# Altium PCB key ledt.PcbDoc
Units mm, origin at the board's own origin, x right, y up, seen from the top; angles counter-clockwise.
Board outline 412.33 x 259.38 mm, 2 copper layers (Top Layer, Bottom Layer); 10 components, 0 nets, 67 pads, 0 vias.
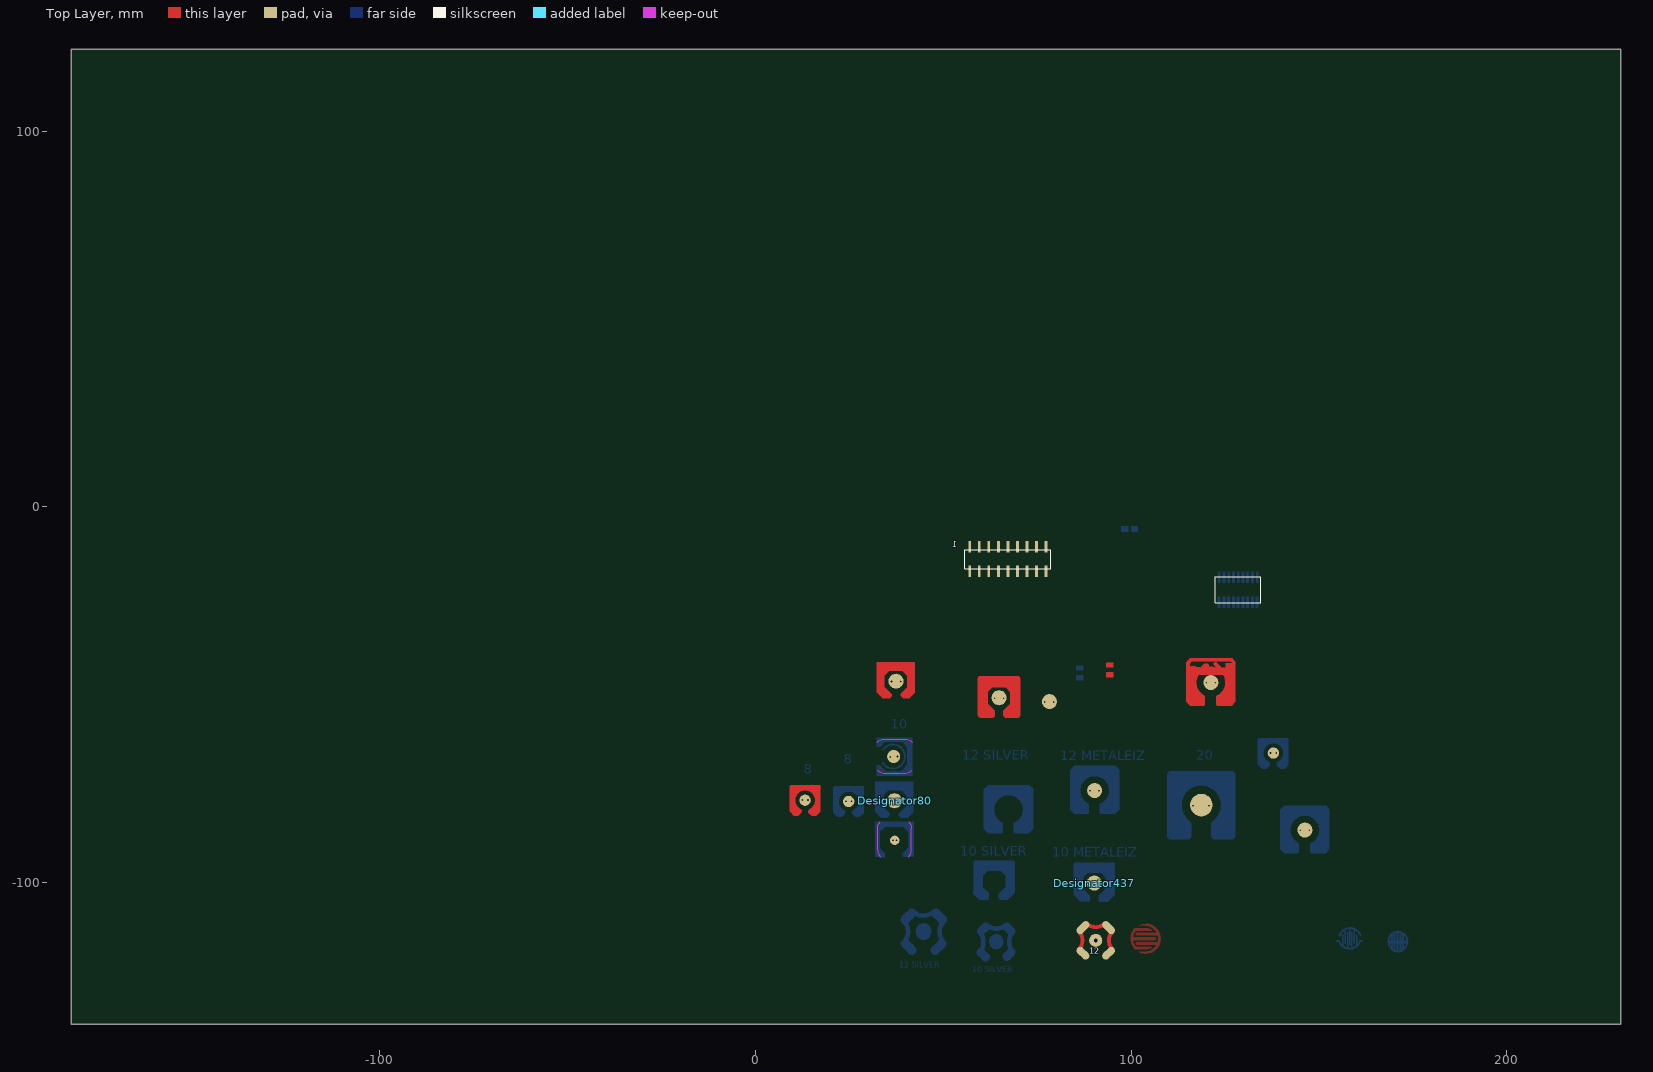
[diagram p0: Top Layer view]
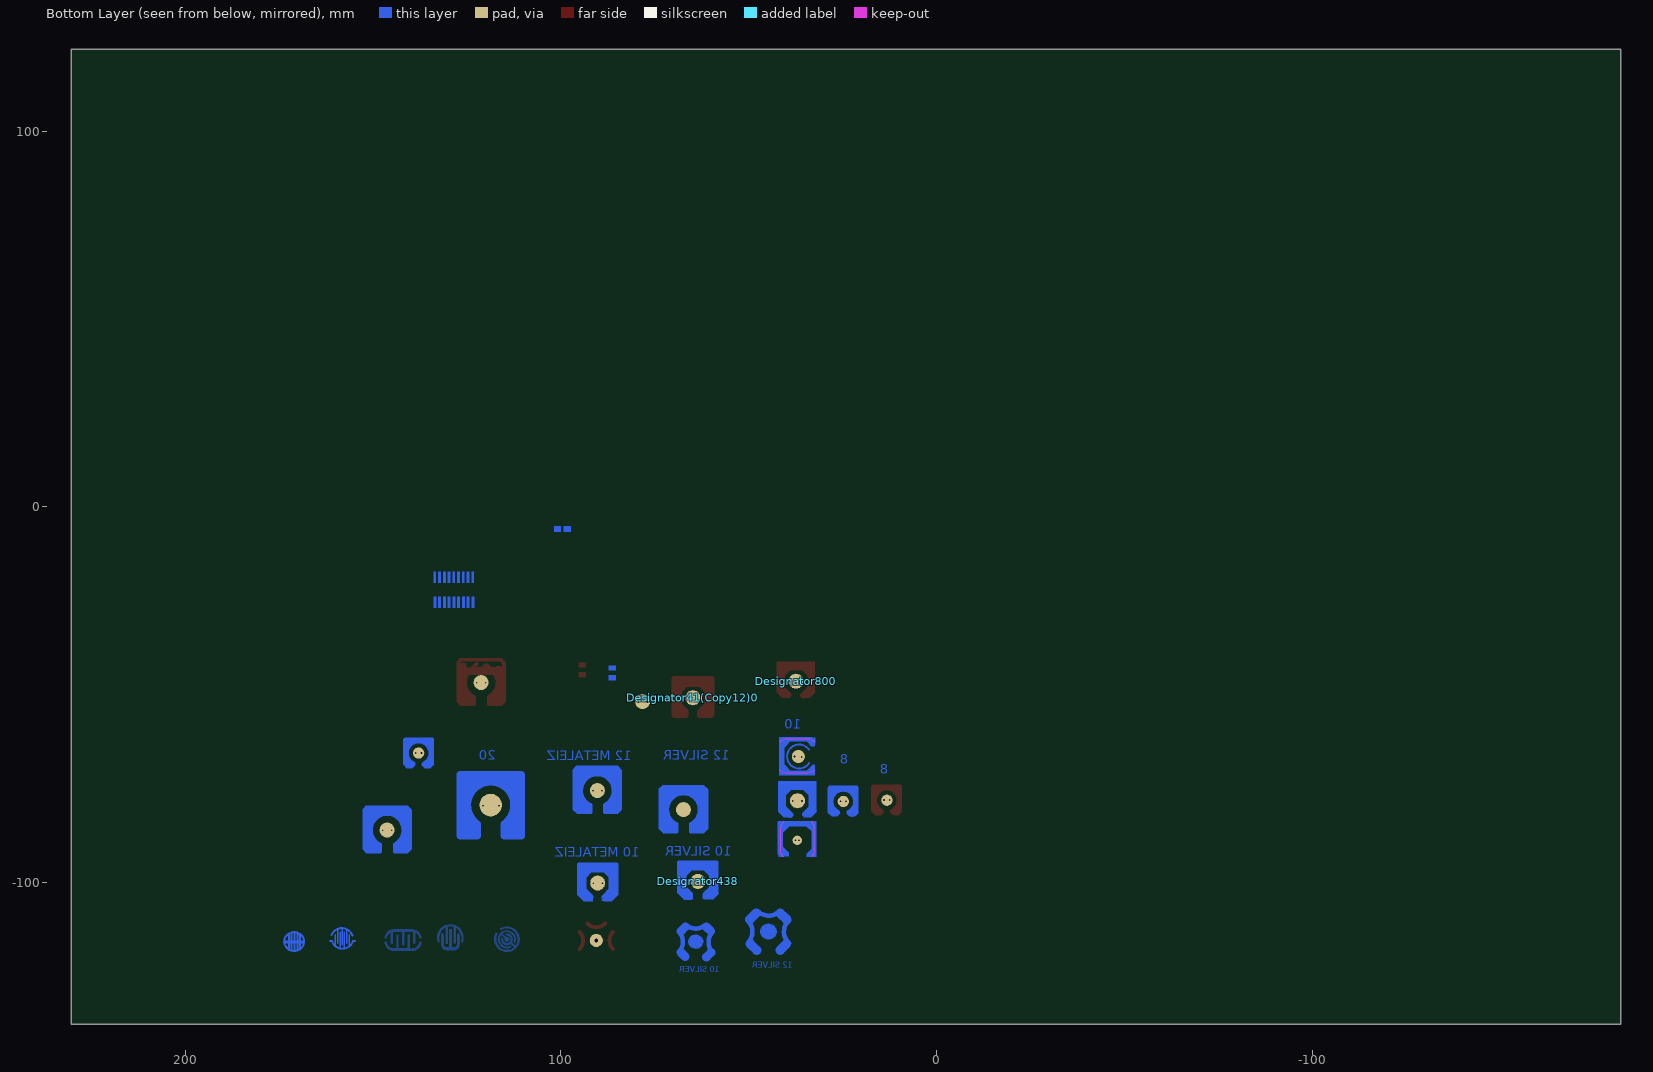
[diagram p1: Bottom Layer view, seen from below]

## Layer stack, top to bottom
Top Solder: solder mask 0.0102, Solder Resist, Dk 3.5
Top Layer: signal copper 0.0356
Dielectric 1: dielectric 0.32, FR-4, Dk 4.8
Bottom Layer: signal copper 0.0356
Bottom Solder: solder mask 0.0102, Solder Resist, Dk 3.5

## Board outline
-182.033,-137.582 230.296,-137.582 230.296,121.802 -182.033,121.802

## Design rules (kind name [scope] priority, off if disabled: settings)
Clearance [All] p1: gap=0.254 ignorepadtopadclearanceinfootprint=FALSE except(0: Arc-Hole Track-Hole SMDPad-Hole THPad-Hole Via-Hole Fill-Hole Poly-Hole Region-Hole Text-Hole)
PolygonConnect [All] p1: connectstyle=Relief reliefconductorwidth=0.254 reliefentries=4 polygonreliefangle="90 Angle" airgapwidth=0.254
RoutingVias [All] p1: holewidth=0.711 width=1.27 viastyle="Through Hole" minholewidth=0.711 minwidth=1.27 maxholewidth=0.711 maxwidth=1.27
SolderMaskExpansion [All] p1: expansion=0.102
Width [All] p1: maxlimit=2 minlimit=0.254 preferedwidth=0.254
30 further rules are at their usual default settings.

## Components (designator, comment, footprint, x,y, rotation, side; value= is the part's Value field where it differs from the comment)
1 "Comment" HDR2X9 57.048,-15.138 r0 top
12 "Comment" MEM/2 90.576,-115.341 r0 top
Designator41(Copy12)0 "Comment" 12B 64.872,-50.775 r0 bottom
Designator80 "Comment" 10 37.036,-78.176 r180 top
Designator437 "Comment" 12#1 90.195,-100.076 r180 top
Designator438 "Comment" 12#2 63.543,-99.621 r180 top
Designator800 "Comment" 10 37.436,-46.376 r0 bottom
? "Comment" PCBComponent_1#1 13.251,-78.003 r180 bottom
? "Comment" PCBComponent_1#1 137.846,-65.456 r0 top
? "Comment" PCBComponent_1#2 146.196,-86.003 r0 top

## Footprints (in the part's own frame and the unit in brackets; to place one, negate y for a bottom-side part, rotate by r counter-clockwise, add the part's x,y. Pads: shape width x height; smd on the part's side, far side on the other; paste and mask are expansions set on the pad)
10 [mm]
  round 4 all layers, no hole: 0(0,0)
  Bottom Layer region: -3.7,-1.8 -3,-1.8 -3,1.7 -3.7,1.7
  Bottom Layer region: -4.5,2.6 -4.1,2.6 -4.1,3 -4.5,3
  Bottom Layer region: -4.699,2.4 -3.999,2.4 -3.999,2.8 -4.699,2.8
  Bottom Layer region: -4.999,0.9 -3.999,0.9 -3.999,2.6 -4.999,2.6
  Bottom Layer region: 4.2,2.5 4.5,2.5 4.5,3 4.2,3
  Bottom Layer region: 4,2.4 4.8,2.4 4.8,2.8 4,2.8
  Bottom Layer region: 4.5,1.6 5,1.6 5,1.7 4.5,1.7
  Bottom Layer region: 4.5,1.7 5,1.7 5,2.5 4.5,2.5
  Bottom Layer region: 3.6,-3.8 5,-3.8 5,-1 3.6,-1
  Bottom Layer region: -5,-3.6 -3.4,-3.6 -3.4,-0.8 -5,-0.8
  Bottom Layer region: -4.999,-5 5.001,-5 5.001,-3.4 -4.999,-3.4
  Bottom Layer region: -2.299,-3.5 2.101,-3.5 2.101,-2.9 -2.299,-2.9
  Bottom Layer region: 2.901,-1.6 3.501,-1.6 3.501,1.7 2.901,1.7
  Bottom Layer lines w0.254: 4.8,2.8 3.4,4.2 2.7,4.2 ; 4.8,1.3 4.8,1.6 4.5,1.9 4.5,2.5 4,3 ; 4.44,2.91 4.44,2.96 4.01,3.39 ; 4.1,3.2 3.4,3.9 3.3,3.9 ; 3.7,-2.9 -2.6,-2.9 ; 3.2,4.2 3.231,4.2 3.531,3.9 3,3.9 5,2.5 ; 3.2,3.9 2.9,4.2 ; 3.1,-1.5 1.7,-2.9 ; 2.3,2.6 2.3,2.4 3,1.7 1.6,3.1 ; 1.95,4.35 3.55,4.35 5,2.9 5,2.5 ; 1.5,-3 1.5,-3.2 ; 1.2,-2.9 1.1,-2.9 ; -1.5,3.2 -3.4,1.3 ; -1.8,-2.9 -3.1,-1.6 ; -1.91,4.43 -3.48,4.43 -5,2.9 -5,2.5 ; -2,2.8 -3,1.8 ; -2.5,4.2 -3.4,4.2 -5,2.6 ; -2.5,-2.5 -2.6,-2.5 -3.5,-3.4 ; -2.7,4 -3.5,4 ; -3.4,3.9 -3.4,3.8 -3.9,3.3 ; -4,2.6 -4.1,2.7 -4.1,3 ; -4.5,3 -3.6,3.9 -3,3.9 -5,2.5 ; 5,2.5 5,-5 -5,-5 -5,2.5
  Bottom Layer lines w1.7: 2.1,3.637 cw(c0,0) -1.972,3.708
12#1 [mm]
  round 4 all layers, no hole: 0(0,0)
  Bottom Layer region: -3.7,-1.8 -3,-1.8 -3,1.7 -3.7,1.7
  Bottom Layer region: -4.5,2.6 -4.1,2.6 -4.1,3 -4.5,3
  Bottom Layer region: -4.7,2.4 -4,2.4 -4,2.8 -4.7,2.8
  Bottom Layer region: -5,0.9 -4,0.9 -4,2.6 -5,2.6
  Bottom Layer region: 4.2,2.5 4.5,2.5 4.5,3 4.2,3
  Bottom Layer region: 4,2.4 4.8,2.4 4.8,2.8 4,2.8
  Bottom Layer region: 4.5,1.6 5,1.6 5,1.7 4.5,1.7
  Bottom Layer region: 4.5,1.7 5,1.7 5,2.5 4.5,2.5
  Bottom Layer region: 3.6,-3.8 5,-3.8 5,-1 3.6,-1
  Bottom Layer region: -5,-3.6 -3.4,-3.6 -3.4,-0.8 -5,-0.8
  Bottom Layer region: -5,-5 5,-5 5,-3.4 -5,-3.4
  Bottom Layer region: -2.3,-3.5 2.1,-3.5 2.1,-2.9 -2.3,-2.9
  Bottom Layer region: 2.9,-1.6 3.5,-1.6 3.5,1.7 2.9,1.7
  Bottom Layer lines w0.254: 5,2.9 5,2.5 3,3.9 3.531,3.9 3.231,4.2 3.2,4.2 ; 4.8,2.8 3.4,4.2 2.7,4.2 ; 4.8,1.3 4.8,1.6 4.5,1.9 4.5,2.5 4,3 ; 4.44,2.91 4.44,2.96 4.01,3.39 ; 4.1,3.2 3.4,3.9 3.3,3.9 ; 3.7,-2.9 -2.6,-2.9 ; 3.2,3.9 2.9,4.2 ; 3.1,-1.5 1.7,-2.9 ; 2.3,2.6 2.3,2.4 3,1.7 1.6,3.1 ; 1.5,-3 1.5,-3.2 ; 1.2,-2.9 1.1,-2.9 ; -1.5,3.2 -3.4,1.3 ; -1.8,-2.9 -3.1,-1.6 ; -2,2.8 -3,1.8 ; -2.5,4.2 -3.4,4.2 -5,2.6 ; -2.5,-2.5 -2.6,-2.5 -3.5,-3.4 ; -2.7,4 -3.5,4 ; -3.4,3.9 -3.4,3.8 -3.9,3.3 ; -4,2.6 -4.1,2.7 -4.1,3 ; -4.5,3 -3.6,3.9 -3,3.9 -5,2.5 -5,2.9
  Bottom Layer lines w0.3: 4.1,4.3 3.689,4.722 ; 3.672,4.734 1.264,4.736 ; 3.235,4.2 3.704,4.72 1.24,4.71 1.24,3.57 1.5,3.31 1.54,3.31 ; 3.21,1.49 1.24,3.46 1.24,3.76 ; 1.5,4.1 1.4,4.6 ; -1.3,3.6 -1.3,4.8 -1.717,4.812 ; -1.734,4.823 -3.617,4.812 ; -1.757,4.812 -1.717,4.812 ; -3.2,4.7 -4.2,4.1 ; -3.53,1.16 -1.27,3.42 -1.27,4.77 -1.717,4.812
  Bottom Layer lines w1: 5,2.9 3.55,4.35 1.95,4.35 ; 5,2.5 5,-5 -5,-5 -5,2.5 ; -1.91,4.43 -3.48,4.43 -5,2.9
  Bottom Layer lines w1.7: 2.1,3.637 cw(c0,0) -1.972,3.708
12#2 [mm]
  round 4 smd far side: 0(0,0)
  Bottom Layer region: -3.7,-1.8 -3,-1.8 -3,1.7 -3.7,1.7
  Bottom Layer region: -4.5,2.6 -4.1,2.6 -4.1,3 -4.5,3
  Bottom Layer region: -4.7,2.4 -4,2.4 -4,2.8 -4.7,2.8
  Bottom Layer region: -5,0.9 -4,0.9 -4,2.6 -5,2.6
  Bottom Layer region: 4.2,2.5 4.5,2.5 4.5,3 4.2,3
  Bottom Layer region: 4,2.4 4.8,2.4 4.8,2.8 4,2.8
  Bottom Layer region: 4.5,1.6 5,1.6 5,1.7 4.5,1.7
  Bottom Layer region: 4.5,1.7 5,1.7 5,2.5 4.5,2.5
  Bottom Layer region: 3.6,-3.8 5,-3.8 5,-1 3.6,-1
  Bottom Layer region: -5,-3.6 -3.4,-3.6 -3.4,-0.8 -5,-0.8
  Bottom Layer region: -5,-5 5,-5 5,-3.4 -5,-3.4
  Bottom Layer region: -2.3,-3.5 2.1,-3.5 2.1,-2.9 -2.3,-2.9
  Bottom Layer region: 2.9,-1.6 3.5,-1.6 3.5,1.7 2.9,1.7
  Bottom Layer lines w0.254: 5,2.9 5,2.5 3,3.9 3.531,3.9 3.231,4.2 3.2,4.2 ; 4.8,2.8 3.4,4.2 2.7,4.2 ; 4.8,1.3 4.8,1.6 4.5,1.9 4.5,2.5 4,3 ; 4.44,2.91 4.44,2.96 4.01,3.39 ; 4.1,3.2 3.4,3.9 3.3,3.9 ; 3.7,-2.9 -2.6,-2.9 ; 3.2,3.9 2.9,4.2 ; 3.1,-1.5 1.7,-2.9 ; 2.3,2.6 2.3,2.4 3,1.7 1.6,3.1 ; 1.5,-3 1.5,-3.2 ; 1.2,-2.9 1.1,-2.9 ; -1.5,3.2 -3.4,1.3 ; -1.8,-2.9 -3.1,-1.6 ; -2,2.8 -3,1.8 ; -2.5,4.2 -3.4,4.2 -5,2.6 ; -2.5,-2.5 -2.6,-2.5 -3.5,-3.4 ; -2.7,4 -3.5,4 ; -3.4,3.9 -3.4,3.8 -3.9,3.3 ; -4,2.6 -4.1,2.7 -4.1,3 ; -4.5,3 -3.6,3.9 -3,3.9 -5,2.5 -5,2.9
  Bottom Layer lines w0.3: 4.1,4.3 3.689,4.722 ; 3.235,4.2 3.704,4.72 1.707,4.72 ; 1.54,3.31 1.5,3.31 ; -1.595,3.095 -3.53,1.16 ; -1.717,4.812 -1.757,4.812 ; -1.734,4.823 -3.617,4.812 ; -3.2,4.7 -4.2,4.1
  Bottom Layer lines w1: 5,2.9 3.55,4.35 1.95,4.35 ; 5,2.5 5,-5 -5,-5 -5,2.5 ; -1.91,4.43 -3.48,4.43 -5,2.9
  Bottom Layer lines w1.7: 2.167,3.598 cw(c0,0) -2.238,3.554
12B [mm]
  round 4 all layers, no hole: 0(0,0)
  Bottom Layer region: 2.9,1.7 3.5,1.7 3.5,-1.6 2.9,-1.6
  Bottom Layer region: -2.3,-2.9 2.1,-2.9 2.1,-3.5 -2.3,-3.5
  Bottom Layer region: -5,-3.4 5,-3.4 5,-5 -5,-5
  Bottom Layer region: -5,-0.8 -3.4,-0.8 -3.4,-3.6 -5,-3.6
  Bottom Layer region: 3.6,-1 5,-1 5,-3.8 3.6,-3.8
  Bottom Layer region: 4.5,2.5 5,2.5 5,1.7 4.5,1.7
  Bottom Layer region: 4.5,1.7 5,1.7 5,1.6 4.5,1.6
  Bottom Layer region: 4,2.8 4.8,2.8 4.8,2.4 4,2.4
  Bottom Layer region: 4.2,3 4.5,3 4.5,2.5 4.2,2.5
  Bottom Layer region: -5,2.6 -4,2.6 -4,0.9 -5,0.9
  Bottom Layer region: -4.7,2.8 -4,2.8 -4,2.4 -4.7,2.4
  Bottom Layer region: -4.5,3 -4.1,3 -4.1,2.6 -4.5,2.6
  Bottom Layer region: -3.7,1.7 -3,1.7 -3,-1.8 -3.7,-1.8
  Bottom Layer lines w0.254: -5,2.9 -5,2.5 -3,3.9 -3.6,3.9 -4.5,3 ; -5,2.6 -3.4,4.2 -2.5,4.2 ; -4.1,3 -4.1,2.7 -4,2.6 ; -3.9,3.3 -3.4,3.8 -3.4,3.9 ; -3.5,4 -2.7,4 ; -3.5,-3.4 -2.6,-2.5 -2.5,-2.5 ; -3.4,1.3 -1.5,3.2 ; -3.1,-1.6 -1.8,-2.9 ; -3,1.8 -2,2.8 ; -2.6,-2.9 3.7,-2.9 ; 1.1,-2.9 1.2,-2.9 ; 1.5,-3 1.5,-3.2 ; 1.6,3.1 3,1.7 2.3,2.4 2.3,2.6 ; 1.7,-2.9 3.1,-1.5 ; 2.7,4.2 3.4,4.2 3.4,2.8 ; 2.9,4.2 3.2,3.9 ; 3.2,4.2 3.231,4.2 3.531,3.9 3,3.9 5,2.5 5,2.9 ; 3.3,3.9 3.4,3.9 4.1,3.2 ; 4,3 4.5,2.5 4.5,1.9 4.8,1.6 4.8,1.3 ; 4.01,3.39 4.44,2.96 4.44,2.91
  Bottom Layer lines w0.3: -4.3,4.4 -3.6,5.1 -1.6,5.1 ; -3.53,1.16 -1.27,3.42 -1.27,4.77 -1.6,5.1 ; -1.84,5.1 -1.6,5.1 ; -1.3,3.6 -1.3,4.8 -1.6,5.1 ; 1.24,3.76 1.24,3.46 3.21,1.49 ; 1.4,4.6 1.8,5 3.7,5 4.4,4.3 ; 1.54,3.31 1.5,3.31 1.24,3.57 1.24,4.71 1.53,5 2.07,5
  Bottom Layer lines w1.5: -5,2.9 -3.48,4.43 -1.91,4.43 ; -5,2.5 -5,-5 5,-5 5,2.5 ; -5,2.25 -5,4.45 -4.81,4.64 -1.85,4.64 ; 1.85,4.61 4.84,4.64 5,4.48 ; 1.95,4.35 3.55,4.35 5,2.9 ; 4.99,4.49 5,4.48 ; 5,1.87 5,4.48
  Bottom Layer lines w1.7: -1.972,3.708 ccw(c0,0) 2.1,3.637
HDR2X9 [mil] "Connector; Header; 9x2 Position"
  rect 30x120 smd: 1(0,-80) 2(0,180) 3(100,-80) 4(100,180) 5(200,-80) 6(200,180) 7(300,-80) 8(300,180) 9(400,-80) 10(400,180) 11(500,-80) 12(500,180) 13(600,-80) 14(600,180) 15(700,-80) 16(700,180) 17(800,-80) 18(800,180)
  silkscreen extent -50,-50 850,150
MEM/2 [mm]
  round 3.5 hole 1: 61(0,0)
  oval 2x4 smd rot 135: 62(-3.412,3.412) 63(3.412,-3.412)
  oval 2x4 smd rot 45: 64(-3.412,-3.412) 65(3.412,3.412)
  Top Layer lines w1: -4.49,-2.335 ccw(c-6.825,0) -4.49,2.335 ; -2.335,4.49 ccw(c0,6.825) 2.335,4.49 ; 4.49,-2.335 cw(c6.825,0) 4.49,2.335
PCBComponent_1#1 [mm]
  round 3 all layers, no hole: 1(-0.004,-0.033)
  round 1.5 hole 0.5: 11(-0.75,0.033) 11(0.75,0.033)
  Bottom Layer lines w0.3: 0.996,-2.833 0.996,-3.233 1.796,-4.033 2.996,-4.033 ; -1.004,-2.833 -1.004,-3.333 -1.704,-4.033 -1.804,-4.033 ; -1.104,-3.033 -1.104,-3.233 -1.904,-4.033 -3.004,-4.033 ; 3.996,-3.033 2.996,-4.033 ; 3.996,-3.033 3.996,3.667 3.696,3.967 -3.704,3.967 -4.004,3.667 -4.004,-3.033 ; 3.996,-3.033 2.996,-4.033 ; 3.996,-3.033 3.996,2.967 2.996,3.967 -3.004,3.967 -4.004,2.967 -4.004,-3.033 ; -3.004,-4.033 -4.004,-3.033 ; -3.004,-4.033 -4.004,-3.033
  Bottom Layer lines w1: 3.196,1.967 3.196,2.267 2.296,3.167 ; 2.796,-1.833 2.796,-2.433 1.996,-3.233 1.696,-3.233 1.996,-3.533 2.896,-3.533 3.396,-3.033 3.396,3.412 3.457,3.472 -3.499,3.472 -3.504,3.467 -3.504,-2.833 -2.804,-3.533 -2.604,-3.333 ; 1.343,-2.83 ccw(c-0.004,-0.033) -1.392,-2.81 ; -1.504,3.067 -2.504,3.067 -3.504,2.067 ; -1.804,-3.333 -2.604,-3.333 ; -2.304,-3.633 -2.604,-3.333 ; -3.204,-0.933 -3.204,-1.933 -2.604,-2.533 -2.604,-3.333
PCBComponent_1#2 [mm]
  round 1.5 hole 0.5: 11(-1.2,-0.026) 11(1.2,-0.026)
  round 4 all layers, no hole: 15(0.029,0.026)
  Bottom Layer region: -5.717,3.885 5.783,3.885 5.783,5.773 -5.717,5.773
  Bottom Layer region: 3.983,-5.015 6.383,-5.015 6.383,5.185 3.983,5.185
  Bottom Layer region: -5.517,-4.915 -3.917,-4.915 -3.917,4.385 -5.517,4.385
  Bottom Layer region: -5.517,-5.315 -2.017,-5.315 -2.017,-3.415 -5.517,-3.415
  Bottom Layer region: -5.917,-4.715 -4.817,-4.715 -4.817,4.385 -5.917,4.385
  Bottom Layer region: 2.183,-5.515 5.283,-5.515 5.283,-3.515 2.183,-3.515
  Bottom Layer region: 2.883,2.885 4.183,2.885 4.183,4.085 2.883,4.085
  Bottom Layer region: 3.183,-4.015 4.583,-4.015 4.583,-2.415 3.183,-2.415
  Bottom Layer region: -4.317,-4.015 -3.017,-4.015 -3.017,-2.515 -4.317,-2.515
  Bottom Layer region: -4.417,2.785 -2.917,2.785 -2.917,4.185 -4.417,4.185
  Bottom Layer lines w0.5: -1.917,-3.515 cw(c0.029,0.026) 1.714,-3.646
  Bottom Layer lines w0.98: -2.417,-3.815 -4.517,-1.715 -4.517,1.085 -4.817,1.385 -1.617,4.585 -0.917,4.585 ; 1.283,4.985 4.683,1.585 4.683,1.385 ; 2.083,-3.915 2.383,-3.915 4.483,-1.815 4.483,1.885
  Bottom Layer lines w1: -1.971,-3.815 -1.971,-5.774 -5.171,-5.774 -6.071,-4.874 -6.071,5.226 -5.171,6.126 5.429,6.126 6.129,5.426 6.129,-4.874 5.229,-5.774 1.883,-5.774 1.883,-3.774

## Free pads (board coordinates)
  round 3 all layers, no hole: 1(24.846,-78.366)
  round 3.5 all layers, no hole: 2(36.8,-66.4)
  round 2.5 all layers, no hole: 2(37.1,-88.7)
  round 6 all layers, no hole: 10(118.666,-79.342)
  round 1.5 hole 0.5: 11(24.1,-78.3) 11(25.6,-78.3) 11(35.8,-78.2) 11(35.9,-66.5) 11(36.2,-46.4) 11(36.6,-88.7) 11(37.6,-88.7) 11(37.8,-66.4) 11(38.3,-78.2) 11(38.7,-46.4) 11(63.7,-50.9) 11(66.1,-50.9) 11(88.966,-100.129) 11(89.063,-75.511) 11(91.366,-100.129) 11(91.463,-75.511) 11(119.974,-46.784) 11(120.673,-79.513) 11(122.374,-46.784) 12(116.473,-79.513) 17(77.013,-51.867) 17(79.413,-51.867)
  round 4 smd far side: 15(67.381,-80.551)
  round 4 all layers, no hole: 15(90.292,-75.459) 15(121.204,-46.731) 16(78.257,-51.816)

## Nets (pads, with @x,y where several pads share a name; then routed paths per layer and width w, separated by ;. In a path a pad name is that pad's centre, name@x,y a point inside that pad or via, vN(x,y) a via of type N, cw(c..) or ccw(c..) an arc to the next point about the centre after c; other vN are vias at no path point)
pads on no net: 1.1 1.2 1.3 1.4 1.5 1.6 1.7 1.8 1.9 1.10 1.11 1.12 1.13 1.14 1.15 1.16 1.17 1.18 12.61 12.62 12.63 12.64 12.65 ?.1 ?.11 ?.15 Designator41(Copy12)0.0 Designator80.0 Designator437.0 Designator438.0 Designator800.0
copper on no net: | length 1105
  Top Layer w0.5: 119.257,-50.272 cw(c121.204,-46.731) 122.888,-50.404
  Top Layer w0.98: 118.757,-50.572 116.657,-48.472 116.657,-45.672 116.357,-45.372 119.557,-42.172 120.257,-42.172 ; 122.457,-41.772 125.857,-45.172 125.857,-45.372 ; 123.257,-50.672 123.557,-50.672 125.657,-48.572 125.657,-44.872
  Top Layer w1: 119.204,-50.572 119.204,-52.531 116.004,-52.531 115.104,-51.631 115.104,-41.531 116.004,-40.631 126.604,-40.631 127.304,-41.331 127.304,-51.631 126.404,-52.531 123.057,-52.531 123.057,-50.531
  Bottom Layer w0.2: 58.143,-102.074 58.143,-102.874 59.643,-104.374 61.843,-104.374 62.143,-104.074 62.143,-102.921 60.296,-101.074 60.143,-101.074
  Bottom Layer w0.23: 65.343,-104.292 65.343,-102.521 65.043,-102.821 65.043,-104.274 65.202,-104.433 67.16,-104.433
  Bottom Layer w0.254: 32.1,-83.701 32.1,-90.3 32.1,-92.3 32.7,-92.9 32.9,-93.1 33.8,-93.1 34.4,-92.5 ; 32.1,-83.7 42.1,-83.7 42.1,-92.4 41.5,-93 39.4,-93 39.4,-92.2 41,-90.6 41,-86.6 39.3,-84.9 36.8,-84.9 34.6,-84.9 32.9,-86.6 32.9,-91 33.8,-91.9 34.4,-92.5 ; 32.458,-70.077 32.458,-71.342 32.4,-71.4 34,-71.4 ; 32.7,-92.2 32.7,-86.3 34.4,-84.6 ; 32.7,-91.1 34.1,-92.5 34.1,-92.8 ; 32.7,-63.4 33,-63.4 34.4,-62 ; 33,-63.1 32.4,-63.7 ; 33.1,-91 34.4,-92.3 34.4,-93.1 ; 33.1,-85.1 33.1,-91.9 33.2,-92 ; 33.3,-69 33.3,-69.3 34.6,-70.6 38.9,-70.6 41,-68.5 41,-64.2 41,-64.1 ; 33.3,-62 39.2,-62 40.9,-63.7 ; 33.5,-62.5 33.6,-62.4 40.4,-62.4 ; 33.8,-92.5 34.4,-93.1 ; 34.5,-62.4 33.2,-63.7 32.4,-63.7 ; 39.6,-92.2 41.3,-90.5 41.3,-86.6 39.2,-84.5 34.9,-84.5 34.8,-84.5 ; 41.799,-61.4 35.2,-61.4 33.2,-61.4 32.6,-62 32.4,-62.2 32.4,-63.1 33,-63.7 ; 41.8,-61.4 41.8,-71.4 33.1,-71.4 32.5,-70.8 32.5,-68.7 33,-68.7 34.6,-70.3 38.9,-70.3 40.6,-68.6 40.6,-66.1 40.6,-63.9 38.9,-62.2 34.5,-62.2 33.6,-63.1 33,-63.7 ; 46.827,-113.005 cw(c44.776,-113.005) 46.827,-112.969 ; 173.371,-115.545 cw(c170.954,-115.642) 173.37,-115.541 ; 173.57,-115.541 ccw(c170.976,-115.634) 173.572,-115.634 ; 173.67,-115.741 cw(c170.97,-115.641) 173.672,-115.641 ; 32.4,-63.7 33,-63.7 ; 32.4,-63.7 32.4,-62.9 32.5,-62.9 32.6,-62.8 ; 32.6,-62.8 32.6,-63.1 32.7,-63 32.7,-62.7 32.6,-62.8 ; 33.5,-92.9 33.8,-92.9 33.7,-92.8 33.4,-92.8 33.5,-92.9 ; 33.5,-92.9 33.6,-93 33.6,-93.1 34.4,-93.1 ; 34.4,-93.1 34.4,-92.5 ; 34.8,-84.5 32.7,-86.6 34.8,-84.5 ; 41,-64.1 38.9,-62 41,-64.1 ; 45.98,-113.005 ccw(c44.776,-113.005) 45.98,-113.005 ; 46.212,-113.005 ccw(c44.776,-113.005) 46.212,-113.005 ; 46.382,-113.005 ccw(c44.776,-113.005) 46.382,-113.005 ; 46.607,-113.005 ccw(c44.776,-113.005) 46.607,-113.005 ; 65.335,-115.672 ccw(c64.13,-115.672) 65.335,-115.672 ; 65.567,-115.672 ccw(c64.13,-115.672) 65.567,-115.672 ; 65.737,-115.672 ccw(c64.13,-115.672) 65.737,-115.672 ; 65.941,-115.672 ccw(c64.11,-115.672) 65.941,-115.672
  Bottom Layer w0.3: 23.046,-82.366 23.146,-82.366 23.846,-81.666 23.846,-81.166 ; 23.746,-81.366 23.746,-81.566 22.946,-82.366 21.846,-82.366 ; 25.846,-81.166 25.846,-81.566 26.646,-82.366 27.846,-82.366 ; 65.582,-104.443 65.211,-104.443 64.948,-104.179 64.948,-102.906 65.848,-102.006 65.989,-102.006 ; 20.846,-81.366 20.846,-74.666 21.146,-74.366 28.546,-74.366 28.846,-74.666 28.846,-81.366 ; 20.846,-81.366 21.846,-82.366 ; 20.846,-81.366 20.846,-75.366 21.846,-74.366 27.846,-74.366 28.846,-75.366 28.846,-81.366 ; 20.846,-81.366 21.846,-82.366 ; 27.846,-82.366 28.846,-81.366 ; 27.846,-82.366 28.846,-81.366
  Bottom Layer w0.4: 156.362,-116.764 156.362,-113.843 ; 156.947,-116.053 156.947,-112.573 ; 157.582,-117.399 157.582,-113.157 ; 158.191,-116.484 158.191,-112.166 ; 158.75,-117.272 158.75,-113.182 ; 159.385,-116.027 159.385,-112.547 ; 159.969,-116.738 159.969,-113.817
  Bottom Layer w0.5: 33.945,-68.17 ccw(c36.6,-66.4) 33.993,-64.56 ; 58.343,-102.074 58.343,-101.874 ; 65.435,-84.093 cw(c67.381,-80.551) 69.066,-84.224 ; 88.346,-79 cw(c90.292,-75.459) 91.977,-79.131 ; 154.788,-115.468 155.372,-115.468 ; 155.397,-115.697 ccw(c158.122,-114.632) 160.909,-115.519 ; 155.473,-114.097 cw(c158.261,-114.984) 160.985,-113.919 ; 160.884,-115.468 161.468,-115.468 ; 169.37,-117.641 169.37,-113.641 ; 170.07,-118.041 170.07,-113.241 ; 170.87,-118.141 170.87,-113.141 ; 171.67,-118.041 171.67,-113.241 ; 172.37,-117.641 172.37,-113.541
  Bottom Layer w0.75: 168.77,-115.741 173.17,-115.741
  Bottom Layer w0.98: 64.935,-84.393 62.835,-82.293 62.835,-79.493 62.535,-79.193 65.735,-75.993 66.435,-75.993 ; 68.635,-75.593 72.035,-78.993 72.035,-79.193 ; 69.435,-84.493 69.735,-84.493 71.835,-82.393 71.835,-78.693 ; 87.846,-79.3 85.746,-77.2 85.746,-74.4 85.446,-74.1 88.646,-70.9 89.346,-70.9 ; 91.546,-70.5 94.946,-73.9 94.946,-74.1 ; 92.346,-79.4 92.646,-79.4 94.746,-77.3 94.746,-73.6
  Bottom Layer w1: 21.346,-76.266 22.346,-75.266 23.346,-75.266 ; 21.646,-79.266 21.646,-80.266 22.246,-80.866 22.246,-81.666 ; 22.546,-81.966 22.246,-81.666 ; 23.046,-81.666 22.246,-81.666 ; 23.458,-81.143 cw(c24.846,-78.366) 26.193,-81.163 ; 27.146,-75.166 28.046,-76.066 28.046,-76.366 ; 27.646,-80.166 27.646,-80.766 26.846,-81.566 26.546,-81.566 26.846,-81.866 27.746,-81.866 28.246,-81.366 28.246,-74.921 28.307,-74.861 21.351,-74.861 21.346,-74.866 21.346,-81.166 22.046,-81.866 22.246,-81.666 ; 65.381,-84.393 65.381,-86.351 62.181,-86.351 61.281,-85.451 61.281,-75.351 62.181,-74.451 72.781,-74.451 73.481,-75.151 73.481,-85.451 72.581,-86.351 69.235,-86.351 69.235,-84.351 ; 88.292,-79.3 88.292,-81.259 85.092,-81.259 84.192,-80.359 84.192,-70.259 85.092,-69.359 95.692,-69.359 96.392,-70.059 96.392,-80.359 95.492,-81.259 92.146,-81.259 92.146,-79.259 ; 111.935,-86.53 111.935,-72.154 112.036,-72.255 125.778,-72.255 125.752,-72.281 125.752,-86.86 125.244,-86.352 124.406,-86.352 124.178,-86.124 124.178,-84.473 125.371,-83.279 125.371,-85.362 124.863,-85.87 124.863,-84.473 124.686,-84.295 123.162,-84.295 ; 112.392,-82.314 112.392,-86.581 112.722,-86.251 114.119,-86.251 114.018,-86.149 114.018,-84.117 112.951,-83.05 112.951,-85.59 113.027,-85.514 113.56,-85.514 113.408,-85.362 ; 113.586,-74.109 112.951,-74.744 112.951,-73.779 112.773,-73.601 114.907,-73.601 112.494,-76.014 112.494,-72.966 112.595,-72.865 115.77,-72.865 ; 113.719,-85.355 113.719,-83.818 ; 115.11,-84.422 112.57,-81.882 112.57,-76.294 115.618,-73.246 120.19,-73.246 121.206,-73.246 123.238,-75.278 124.762,-76.802 124.762,-80.866 124.762,-81.882 122.222,-84.422 ; 123.746,-86.454 123.746,-83.914 125.778,-81.882 ; 124,-74.211 123.873,-74.211 122.882,-73.22 124.584,-73.22 124.609,-73.246 124.609,-75.684 121.587,-72.662 125.067,-72.662 125.143,-72.738 125.143,-76.7
  Bottom Layer w1.2: 39.297,-116.043 ccw(c36.577,-113.021) 39.724,-110.447 ; 41.856,-107.544 ccw(c44.732,-104.669) 47.467,-107.677 ; 49.984,-115.672 cw(c53.087,-113.043) 50.314,-110.07 ; 59.553,-118.634 ccw(c56.64,-115.797) 59.859,-113.313 ; 61.417,-111.125 ccw(c64.15,-108.115) 66.745,-111.245 ; 68.376,-113.221 ccw(c71.595,-115.705) 68.682,-118.542 ; 114.943,-83.779 cw(c118.666,-79.342) 122.389,-83.779
  Bottom Layer w2: 115.11,-84.422 115.11,-87.47 110.538,-87.47 110.538,-71.214 126.794,-71.214 126.794,-87.47 122.222,-87.47 122.222,-84.422
  Bottom Layer w2.2: 44.701,-113.005 44.881,-113.005 ; 64.056,-115.672 64.236,-115.672
  Bottom Layer w2.3: 60.046,-118.542 61.251,-119.767 ; 60.071,-112.903 61.296,-111.697 ; 66.853,-111.658 68.058,-112.884 ; 66.898,-119.722 68.123,-118.516
  Bottom Layer w2.5: 39.847,-109.816 41.591,-108.132 ; 39.955,-116.242 41.64,-117.986 ; 47.848,-117.944 49.592,-116.26 ; 48.003,-108.052 49.718,-109.766

## Polygon pours and split planes (outlines as drawn)
no net on Top Layer "Bottom Layer-No Net" (solid, pour order 2): 104.501,-112.089 105.212,-112.343 105.441,-112.47 105.441,-112.496 105.517,-112.572 105.517,-112.623 105.466,-112.699 105.365,-112.75 101.25,-112.775 101.097,-112.978 100.92,-113.232 100.742,-113.588 100.64,-113.918 100.564,-114.121 100.513,-114.325 100.488,-114.553 106.33,-114.553 106.457,-114.579 106.533,-114.629 106.609,-114.68 106.66,-114.782 106.685,-114.909 106.635,-115.061 106.558,-115.163 106.431,-115.214 106.33,-115.239 100.513,-115.239 100.539,-115.468 100.589,-115.722 100.64,-115.925 100.742,-116.153 100.843,-116.407 101.047,-116.763 101.301,-117.042 105.314,-117.042 105.441,-117.093 105.492,-117.144 105.517,-117.246 105.415,-117.347 105.212,-117.474 104.857,-117.601 104.476,-117.728 100.996,-117.728 100.691,-117.347 100.285,-116.788 100.132,-116.357 99.98,-115.899 99.878,-115.442 99.853,-114.96 99.878,-114.502 99.929,-114.045 100.081,-113.461 100.361,-112.877 100.767,-112.293 100.92,-112.089 104.501,-112.089
no net on Top Layer "Bottom Layer-No Net" (solid, pour order 0): 102.19,-111.505 102.19,-111.327 102.825,-111.048 103.942,-110.87 104.73,-110.946 105.517,-111.2 106.177,-111.581 106.736,-112.064 107.193,-112.674 107.498,-113.258 107.778,-114.071 107.828,-114.883 107.752,-115.645 107.549,-116.458 107.193,-117.119 106.711,-117.728 106.152,-118.185 105.517,-118.566 104.831,-118.795 103.993,-118.871 103.485,-118.871 102.748,-118.693 102.164,-118.414 102.164,-118.236 102.698,-118.363 103.129,-118.414 103.891,-118.363 104.425,-118.262 104.907,-118.109 105.39,-117.881 105.847,-117.576 106.203,-117.246 106.508,-116.915 106.787,-116.484 101.504,-116.458 101.351,-116.407 101.224,-116.23 101.224,-116.128 101.25,-116.001 101.326,-115.899 101.402,-115.823 101.504,-115.798 101.58,-115.798 107.066,-115.772 107.143,-115.569 107.193,-115.264 107.219,-114.909 107.193,-114.477 107.143,-114.223 107.066,-113.918 101.504,-113.918 101.351,-113.867 101.25,-113.74 101.224,-113.588 101.25,-113.461 101.326,-113.334 101.402,-113.283 101.555,-113.232 106.762,-113.232 106.558,-112.928 106.406,-112.724 106.152,-112.47 105.771,-112.14 105.39,-111.886 104.831,-111.632 104.399,-111.454 103.891,-111.378 103.079,-111.327 102.19,-111.505
no net on Bottom Layer "Bottom Layer-No Net" (solid, pour order 14): 131.181,-116.408 131.181,-113.817 131.206,-113.665 131.283,-113.563 131.384,-113.487 131.486,-113.461 131.613,-113.487 131.714,-113.563 131.791,-113.665 131.816,-113.817 131.816,-116.408 131.791,-116.636 131.765,-116.789 131.689,-117.017 131.537,-117.297 131.359,-117.5 131.105,-117.703 130.876,-117.83 130.546,-117.932 130.241,-117.957 128.489,-117.957 128.158,-117.932 127.879,-117.83 127.65,-117.703 127.396,-117.5 127.219,-117.271 127.066,-117.017 126.99,-116.738 126.965,-116.535 126.939,-116.255 126.939,-113.919 126.965,-113.766 127.041,-113.665 127.142,-113.614 127.269,-113.588 127.371,-113.614 127.473,-113.665 127.549,-113.766 127.574,-113.893 127.574,-116.357 127.6,-116.509 127.65,-116.687 127.727,-116.84 127.803,-116.941 127.93,-117.043 128.082,-117.119 128.285,-117.17 128.438,-117.195 129.047,-117.195 129.047,-112.75 129.047,-112.674 129.064,-112.58 129.089,-112.505 129.124,-112.445 129.2,-112.395 129.251,-112.369 129.327,-112.344 129.378,-112.344 129.428,-112.344 129.505,-112.369 129.555,-112.395 129.606,-112.445 129.632,-112.496 129.682,-112.572 129.708,-112.649 129.682,-117.17 130.419,-117.17 130.622,-117.144 130.851,-117.017 130.952,-116.941 131.054,-116.814 131.054,-116.789 131.13,-116.687 131.181,-116.484 131.181,-116.408
no net on Bottom Layer "Bottom Layer-No Net" (solid, pour order 12): 132.324,-115.722 132.4,-114.833 132.4,-114.731 132.375,-114.376 132.273,-113.842 132.146,-113.436 131.943,-113.055 131.664,-112.649 131.359,-112.318 131.029,-112.064 130.648,-111.836 130.648,-115.951 130.622,-116.078 130.571,-116.154 130.495,-116.205 130.394,-116.23 130.292,-116.205 130.216,-116.154 130.14,-116.052 130.14,-115.976 130.14,-111.785 130.165,-111.658 129.403,-111.556 129.149,-111.556 128.92,-111.582 128.539,-111.683 128.539,-111.785 128.539,-115.976 128.514,-116.078 128.463,-116.154 128.387,-116.205 128.311,-116.23 128.184,-116.205 128.108,-116.154 128.057,-116.052 128.031,-115.951 128.031,-111.912 127.676,-112.141 127.396,-112.395 127.092,-112.75 126.838,-113.131 126.66,-113.512 126.533,-113.919 126.431,-114.35 126.406,-114.833 126.507,-115.697 126.457,-115.824 126.406,-115.849 126.33,-115.874 126.253,-115.849 126.152,-115.798 126.101,-115.747 126.076,-115.62 126.025,-115.443 125.974,-115.214 125.949,-115.062 125.923,-114.808 125.923,-114.604 125.999,-113.893 126.203,-113.233 126.507,-112.623 126.939,-112.115 127.422,-111.709 128.057,-111.353 128.692,-111.15 129.403,-111.074 130.14,-111.15 130.775,-111.353 131.384,-111.683 131.892,-112.115 132.324,-112.649 132.629,-113.207 132.832,-113.893 132.908,-114.604 132.883,-115.062 132.807,-115.468 132.73,-115.722 132.654,-115.773 132.578,-115.824 132.502,-115.849 132.426,-115.824 132.349,-115.798 132.324,-115.722
no net on Bottom Layer "Bottom Layer-No Net" (solid, pour order 10): 137.607,-115.646 137.658,-116.027 137.76,-116.382 137.912,-116.636 138.293,-117.068 138.801,-117.348 139.131,-117.449 139.487,-117.475 140.223,-117.5 140.198,-114.096 140.249,-113.893 140.35,-113.817 140.477,-113.792 140.604,-113.817 140.681,-113.893 140.731,-114.02 140.731,-114.223 140.731,-117.475 143.221,-117.475 143.221,-114.046 143.246,-113.919 143.297,-113.868 143.398,-113.817 143.5,-113.792 143.602,-113.817 143.678,-113.868 143.703,-113.944 143.729,-114.071 143.729,-117.475 144.465,-117.475 144.872,-117.449 145.176,-117.348 145.481,-117.195 145.684,-117.068 145.888,-116.84 146.065,-116.636 146.192,-116.382 146.319,-116.052 146.345,-115.671 146.853,-115.671 146.802,-116.205 146.65,-116.636 146.446,-117.043 146.167,-117.373 145.786,-117.703 145.38,-117.932 144.897,-118.059 144.44,-118.11 139.487,-118.11 139.03,-118.059 138.598,-117.932 138.191,-117.703 137.861,-117.424 137.531,-117.068 137.302,-116.611 137.175,-116.23 137.099,-115.646 137.607,-115.646
no net on Bottom Layer "Bottom Layer-No Net" (solid, pour order 8): 146.37,-114.808 146.853,-114.808 146.802,-114.3 146.65,-113.817 146.37,-113.385 146.091,-113.055 145.735,-112.776 145.278,-112.547 144.77,-112.42 144.389,-112.395 139.385,-112.395 138.979,-112.471 138.522,-112.623 138.064,-112.903 137.785,-113.157 137.531,-113.461 137.353,-113.792 137.252,-114.046 137.175,-114.3 137.15,-114.579 137.125,-114.808 137.607,-114.808 137.633,-114.528 137.734,-114.223 137.937,-113.842 138.09,-113.639 138.293,-113.461 138.496,-113.309 138.699,-113.182 138.699,-115.9 138.725,-116.027 138.776,-116.103 138.877,-116.179 138.979,-116.179 139.106,-116.154 139.157,-116.103 139.207,-116.027 139.233,-115.925 139.233,-113.03 139.512,-113.03 141.722,-113.03 141.722,-116.306 141.747,-116.408 141.798,-116.509 141.874,-116.56 141.976,-116.56 142.052,-116.56 142.154,-116.484 142.205,-116.433 142.23,-116.306 142.23,-113.03 144.491,-113.03 144.719,-113.055 144.719,-115.951 144.745,-116.027 144.795,-116.103 144.872,-116.179 144.973,-116.205 145.1,-116.154 145.151,-116.103 145.202,-116.027 145.227,-115.925 145.227,-113.182 145.354,-113.258 145.481,-113.309 145.634,-113.436 145.761,-113.538 145.989,-113.792 146.142,-114.046 146.269,-114.3 146.319,-114.554 146.345,-114.808 146.37,-114.808
no net on Bottom Layer "Bottom Layer-No Net" (solid, pour order 6): 114.59,-114.46 114.315,-114.41 114.065,-114.46 113.89,-114.585 113.79,-114.735 113.715,-114.96 113.715,-115.16 113.79,-115.335 113.89,-115.46 114.015,-115.56 114.24,-115.635 114.465,-115.635 114.715,-115.535 114.865,-115.36 114.965,-115.21 114.99,-115.035 114.915,-114.735 115.915,-113.86 116.04,-114.035 116.165,-114.26 116.265,-114.61 116.315,-114.885 116.315,-115.06 116.265,-115.41 116.19,-115.735 116.065,-115.96 115.99,-116.11 115.79,-116.36 115.465,-116.66 115.115,-116.86 114.74,-116.96 114.34,-117.01 114.04,-116.985 113.74,-116.885 113.49,-116.785 113.19,-117.11 113.515,-117.26 113.89,-117.36 114.39,-117.435 114.84,-117.385 115.29,-117.235 115.715,-117.01 116.04,-116.71 116.39,-116.26 116.54,-115.985 116.69,-115.535 116.74,-115.06 116.69,-114.535 116.54,-114.085 116.39,-113.81 116.09,-113.385 115.715,-113.085 115.315,-112.86 114.865,-112.71 114.365,-112.66 113.915,-112.71 113.415,-112.885 113.04,-113.06 112.69,-113.385 112.415,-113.71 112.19,-114.16 112.04,-114.535 111.99,-115.11 112.04,-115.435 112.14,-115.81 112.24,-116.085 112.565,-115.76 112.465,-115.435 112.44,-115.11 112.465,-114.66 112.59,-114.26 112.765,-113.96 113.015,-113.635 113.29,-113.435 113.615,-113.235 113.915,-113.16 114.39,-113.085 114.89,-113.16 115.215,-113.26 115.415,-113.385 115.615,-113.535
no net on Bottom Layer "Bottom Layer-No Net" (solid, pour order 4): 117.24,-113.21 116.84,-113.61 117.04,-114.01 117.14,-114.41 117.215,-115.01 117.14,-115.635 116.99,-116.135 116.715,-116.66 116.39,-117.06 116.015,-117.385 115.465,-117.66 114.915,-117.835 114.34,-117.885 113.815,-117.835 113.24,-117.66 112.865,-117.485 112.415,-117.11 113.415,-116.26 113.715,-116.435 114.065,-116.56 114.39,-116.585 114.69,-116.56 114.965,-116.46 115.24,-116.31 115.465,-116.135 115.665,-115.885 115.79,-115.61 115.89,-115.36 115.915,-115.06 115.84,-114.535 115.39,-114.985 115.365,-115.26 115.29,-115.435 115.19,-115.635 115.065,-115.785 114.89,-115.91 114.665,-116.01 114.365,-116.06 114.09,-116.035 113.94,-115.985 113.765,-115.885 113.59,-115.76 113.465,-115.585 113.365,-115.435 113.315,-115.235 113.29,-115.035 113.315,-114.835 113.365,-114.66 113.465,-114.485 113.615,-114.31 113.765,-114.185 113.89,-114.11 114.14,-114.035 114.39,-114.01 114.84,-113.56 114.39,-113.485 114.115,-113.51 113.79,-113.61 113.54,-113.735 113.29,-113.935 113.09,-114.16 112.94,-114.435 112.865,-114.735 112.84,-115.01 112.84,-115.285 112.94,-115.61 113.065,-115.86 112.115,-116.76 111.94,-116.56 111.765,-116.26 111.615,-115.785 111.515,-115.385 111.49,-115.01 111.565,-114.46 111.69,-113.96 111.965,-113.435 112.315,-112.985 112.74,-112.635 113.24,-112.36 113.74,-112.21 114.24,-112.16 114.69,-112.16 115.14,-112.26 115.465,-112.36 115.915,-112.61 116.265,-112.235 116.015,-112.085 115.74,-111.935 115.365,-111.81 114.89,-111.685 114.565,-111.66 114.265,-111.66 113.69,-111.71 113.04,-111.91 112.465,-112.235 111.99,-112.635 111.565,-113.135 111.265,-113.76 111.09,-114.335 110.99,-115.01 111.065,-115.685 111.265,-116.335 111.565,-116.91 112.015,-117.46 112.49,-117.835 113.04,-118.16 113.715,-118.36 114.39,-118.435 115.04,-118.36 115.69,-118.135 116.315,-117.81 116.765,-117.435 117.19,-116.91 117.49,-116.31 117.69,-115.735 117.765,-115.06 117.74,-114.735 117.665,-114.235 117.565,-113.885 117.415,-113.56 117.24,-113.235

## Keep-outs
Keep-Out Layer:
  lines w0.013: 32.458,-70.077 32.831,-70.385 33.259,-70.618 33.731,-70.765 34.237,-70.817 39.975,-70.817 40.481,-70.765 40.953,-70.618 41.381,-70.385 41.754,-70.077 ; 32.458,-62.557 32.831,-62.249 33.259,-62.016 33.731,-61.868 34.237,-61.817 39.975,-61.817 40.481,-61.868 40.953,-62.016 41.381,-62.249 41.754,-62.557 ; 33.257,-93.042 32.949,-92.669 32.716,-92.241 32.568,-91.769 32.517,-91.263 32.517,-85.525 32.568,-85.019 32.716,-84.547 32.949,-84.119 33.257,-83.746 ; 40.777,-93.042 41.085,-92.669 41.318,-92.241 41.465,-91.769 41.517,-91.263 41.517,-85.525 41.465,-85.019 41.318,-84.547 41.085,-84.119 40.777,-83.746

## Other copper
Top Layer:
  rectangle: 93.263,-45.364 95.263,-43.964
  rectangle: 93.263,-42.764 95.263,-41.364
  rectangle: 123.357,-52.272 126.457,-50.272
  rectangle: 116.757,-43.972 118.257,-42.572
  rectangle: 124.057,-43.872 125.357,-42.672
  rectangle: 115.748,-44.712 127.248,-42.824
  rectangle: 116.857,-50.772 118.157,-49.272
  rectangle: 124.357,-50.772 125.757,-49.172
  rectangle: 115.257,-51.472 116.357,-42.372
  rectangle: 115.657,-52.072 119.157,-50.172
  rectangle: 115.657,-51.672 117.257,-42.372
  rectangle: 125.157,-51.772 127.557,-41.572
Bottom Layer:
  region: 99.289,-5.011 97.333,-5.011 97.333,-6.637 99.289,-6.637
  region: 101.879,-5.011 99.924,-5.011 99.924,-6.637 101.879,-6.637
  rectangle: 85.263,-46.164 87.263,-44.764
  rectangle: 85.263,-43.564 87.263,-42.164
  rectangle: 32.1,-84.9 42.1,-83.7
  rectangle: 40.9,-93.1 42.1,-83.7
  rectangle: 32.1,-93.1 32.9,-83.7
  rectangle: 32.7,-85.75 33.75,-84.6
  rectangle: 40,-85.6 41.3,-84.7
  rectangle: 39.4,-93 41.2,-92
  rectangle: 40.2,-92.3 41.1,-91.4
  rectangle: 32.9,-93.1 33.5,-91.6
  rectangle: 32,-93.2 33.6,-91.8
  rectangle: 33.4,-92.8 34.1,-92.2
  rectangle: 32.7,-91.8 33.2,-91.3
  rectangle: 40.6,-91.6 41.3,-91
  rectangle: 39.9,-92.2 40.5,-91.7
  rectangle: 40.5,-86 41.1,-85.4
  rectangle: 39.6,-85.2 40.3,-84.7
  rectangle: 33.5,-85.3 34.2,-84.8
  rectangle: 32.7,-86.1 33.4,-85.5
  rectangle: 33,-69.5 33.4,-69
  rectangle: 32.5,-70.4 33.2,-68.7
  region: 40.6,-61.4 40.6,-71.4 41.8,-71.4 41.8,-61.4
  region: 32.4,-70.2 32.4,-71.4 41.8,-71.4 41.8,-70.2
  region: 32.4,-61.4 32.4,-62.2 41.8,-62.2 41.8,-61.4
  region: 39.75,-62 39.75,-63.05 40.9,-63.05 40.9,-62
  region: 39.9,-69.3 39.9,-70.6 40.8,-70.6 40.8,-69.3
  region: 33.1,-69.6 33.1,-70.5 34,-70.5 34,-69.6
  region: 32.4,-62.2 32.4,-62.8 33.9,-62.8 33.9,-62.2
  region: 32.3,-61.3 32.3,-62.9 33.7,-62.9 33.7,-61.3
  region: 32.7,-62.7 32.7,-63.4 33.3,-63.4 33.3,-62.7
  region: 33.7,-62 33.7,-62.5 34.2,-62.5 34.2,-62
  region: 33.7,-70 33.7,-70.7 34.3,-70.7 34.3,-70
  region: 33.2,-69.3 33.2,-69.9 33.7,-69.9 33.7,-69.3
  region: 39.5,-69.8 39.5,-70.4 40.1,-70.4 40.1,-69.8
  region: 40.3,-68.9 40.3,-69.6 40.8,-69.6 40.8,-68.9
  region: 40.2,-62.8 40.2,-63.5 40.7,-63.5 40.7,-62.8
  region: 39.4,-62 39.4,-62.7 40,-62.7 40,-62
  rectangle: 61.635,-76.693 73.135,-74.805
  rectangle: 71.335,-85.593 73.735,-75.393
  rectangle: 61.835,-85.493 63.435,-76.193
  rectangle: 61.835,-85.893 65.335,-83.993
  rectangle: 61.435,-85.293 62.535,-76.193
  rectangle: 69.535,-86.093 72.635,-84.093
  rectangle: 70.235,-77.693 71.535,-76.493
  rectangle: 70.535,-84.593 71.935,-82.993
  rectangle: 63.035,-84.593 64.335,-83.093
  rectangle: 62.935,-77.793 64.435,-76.393
  rectangle: 85.846,-72.7 87.346,-71.3
  rectangle: 85.946,-79.5 87.246,-78
  rectangle: 93.446,-79.5 94.846,-77.9
  rectangle: 93.146,-72.6 94.446,-71.4
  rectangle: 92.446,-81 95.546,-79
  rectangle: 84.346,-80.2 85.446,-71.1
  rectangle: 84.746,-80.8 88.246,-78.9
  rectangle: 84.746,-80.4 86.346,-71.1
  rectangle: 94.246,-80.5 96.646,-70.3
  rectangle: 84.546,-71.6 96.046,-69.712
  rectangle: 133.172,-20.269 133.934,-17.221
  rectangle: 131.887,-20.269 132.649,-17.221
  rectangle: 130.627,-20.269 131.389,-17.221
  rectangle: 129.367,-20.269 130.129,-17.221
  rectangle: 128.107,-20.269 128.869,-17.221
  rectangle: 126.847,-20.269 127.609,-17.221
  rectangle: 125.587,-20.269 126.349,-17.221
  rectangle: 124.327,-20.269 125.089,-17.221
  rectangle: 123.067,-20.269 123.829,-17.221
  rectangle: 133.121,-26.873 133.883,-23.825
  rectangle: 131.861,-26.873 132.623,-23.825
  rectangle: 130.601,-26.873 131.363,-23.825
  rectangle: 129.341,-26.873 130.103,-23.825
  rectangle: 128.081,-26.873 128.843,-23.825
  rectangle: 126.821,-26.873 127.583,-23.825
  rectangle: 125.561,-26.873 126.323,-23.825
  rectangle: 124.301,-26.873 125.063,-23.825
  rectangle: 123.041,-26.873 123.803,-23.825
  text "10" at 36,-59 h2.5
  text "20" at 117.373,-67.213 h2.5
  text "12 SILVER" at 55.11,-67.286 h2.5
  text "12 METALEIZ" at 81.146,-67.4 h2.5
  text "8" at 23.546,-68.359 h2.5
  text "8" at 12.878,-70.975 h2.5
  text "10 SILVER" at 54.483,-92.786 h2.5
  text "10 METALEIZ" at 78.969,-93.015 h2.5
  text "12 SILVER" at 38.303,-122.555 h1.52
  text "10 SILVER" at 57.709,-123.774 h1.52

## Silkscreen, mask and mechanical layers (free items; w line width, h text height)
Top Overlay:
  lines w0.2: 122.352,-25.451 134.544,-25.451 134.544,-18.593 122.352,-18.593 122.352,-25.451
Bottom Solder:
  text "led small" at 96.215,-10.211 h1.52
Mechanical 1:
  rectangle: 20.9,-93.3 30,-84.4
Mechanical 2:
  rectangle: 10.5,-93.3 19.6,-84.4
  lines w0.013: 154.676,-115.386 155.55,-115.356 ; 155.292,-114.066 155.855,-113.174 156.587,-112.551 157.424,-112.189 158.303,-112.081 159.162,-112.218 159.938,-112.593 160.569,-113.199 160.992,-114.026 161.007,-114.053 ; 155.318,-115.506 155.882,-116.399 156.613,-117.022 157.45,-117.384 158.329,-117.492 159.188,-117.354 159.964,-116.979 160.595,-116.374 161.019,-115.546 161.033,-115.52 ; 160.676,-115.486 161.55,-115.456 ; 156.216,-116.682 156.52,-116.682 156.52,-113.811 156.216,-113.811 156.216,-116.682 ; 156.816,-116.153 157.12,-116.153 157.12,-112.511 156.816,-112.511 156.816,-116.153 ; 157.416,-117.244 157.72,-117.244 157.72,-113.07 157.416,-113.07 157.416,-117.244 ; 158.016,-116.51 158.32,-116.51 158.32,-112.124 158.016,-112.124 158.016,-116.51 ; 158.616,-117.244 158.92,-117.244 158.92,-113.07 158.616,-113.07 158.616,-117.244 ; 159.216,-116.153 159.52,-116.153 159.52,-112.511 159.216,-112.511 159.216,-116.153 ; 159.815,-116.682 160.12,-116.682 160.12,-113.811 159.815,-113.811 159.815,-116.682

## Dimensions
74.066,-10.82 to 74.066,-17.424 on Top Layer
74.066,-10.82 to 71.526,-10.82 on Top Layer